# EAGLE board panel (EAGLE 6.3)
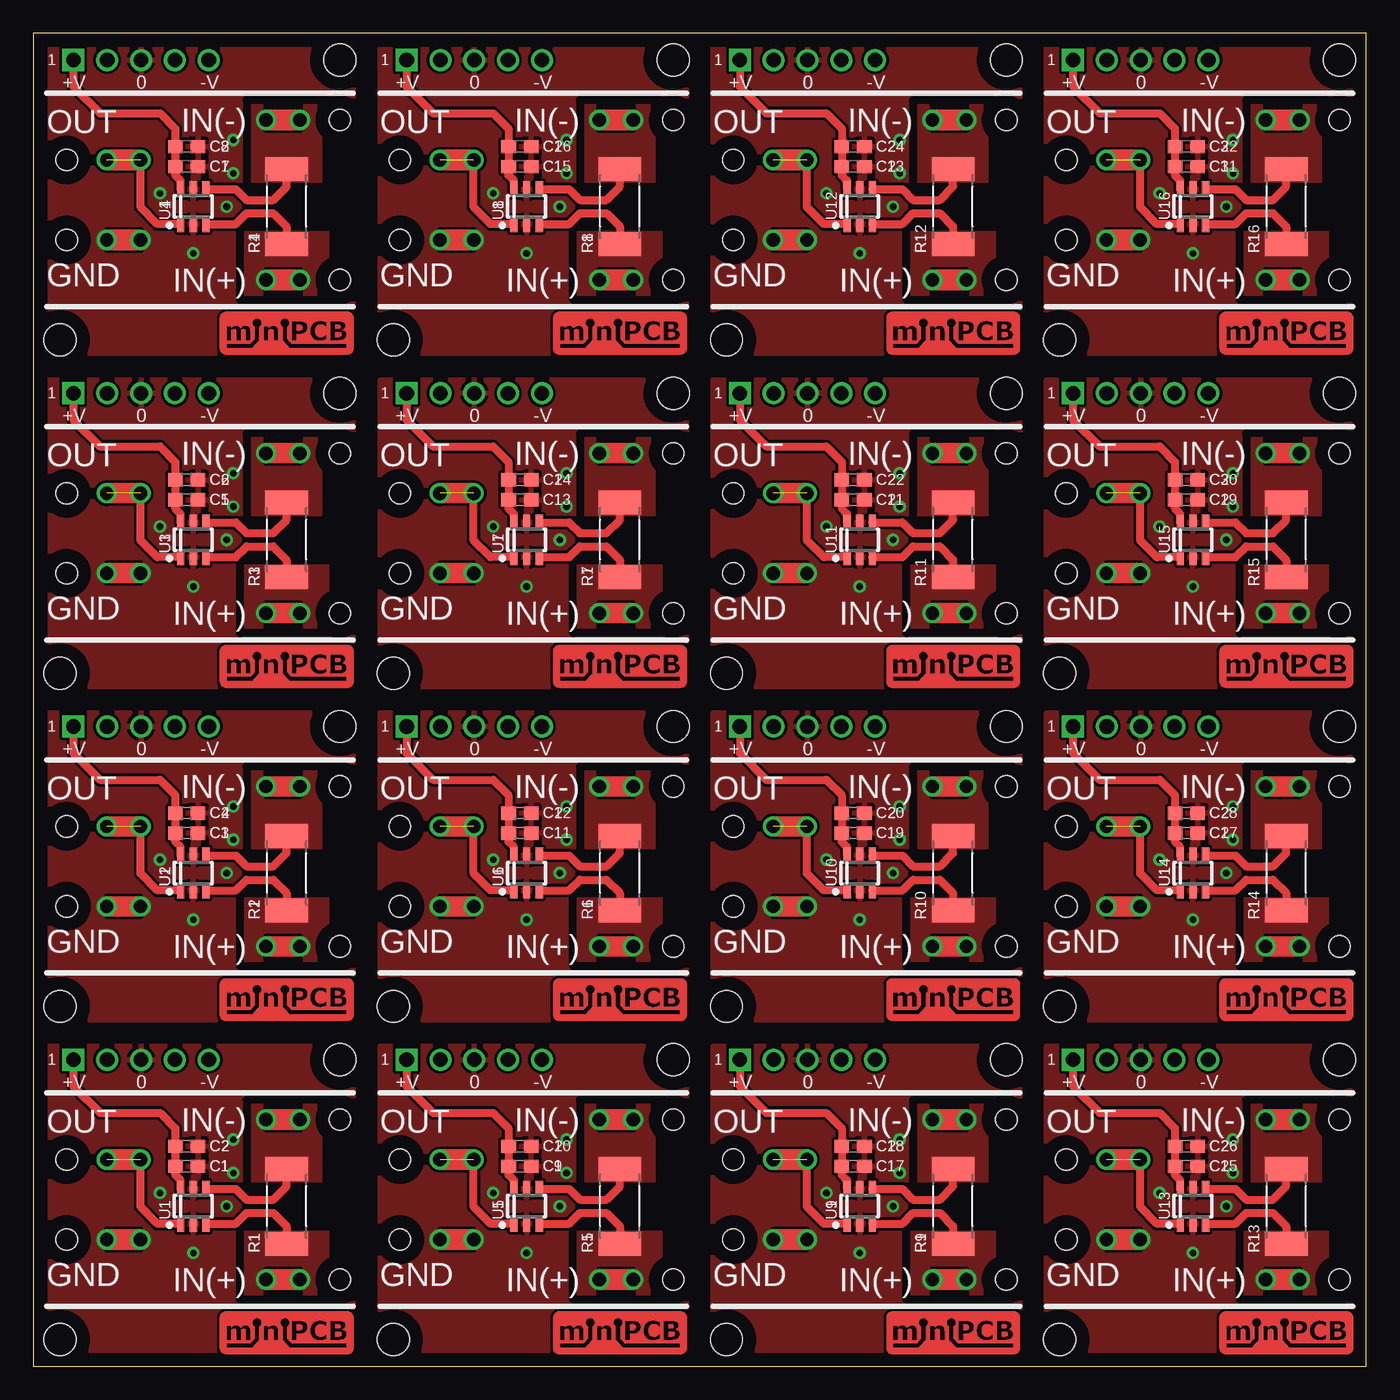
[diagram p0: board, top side]
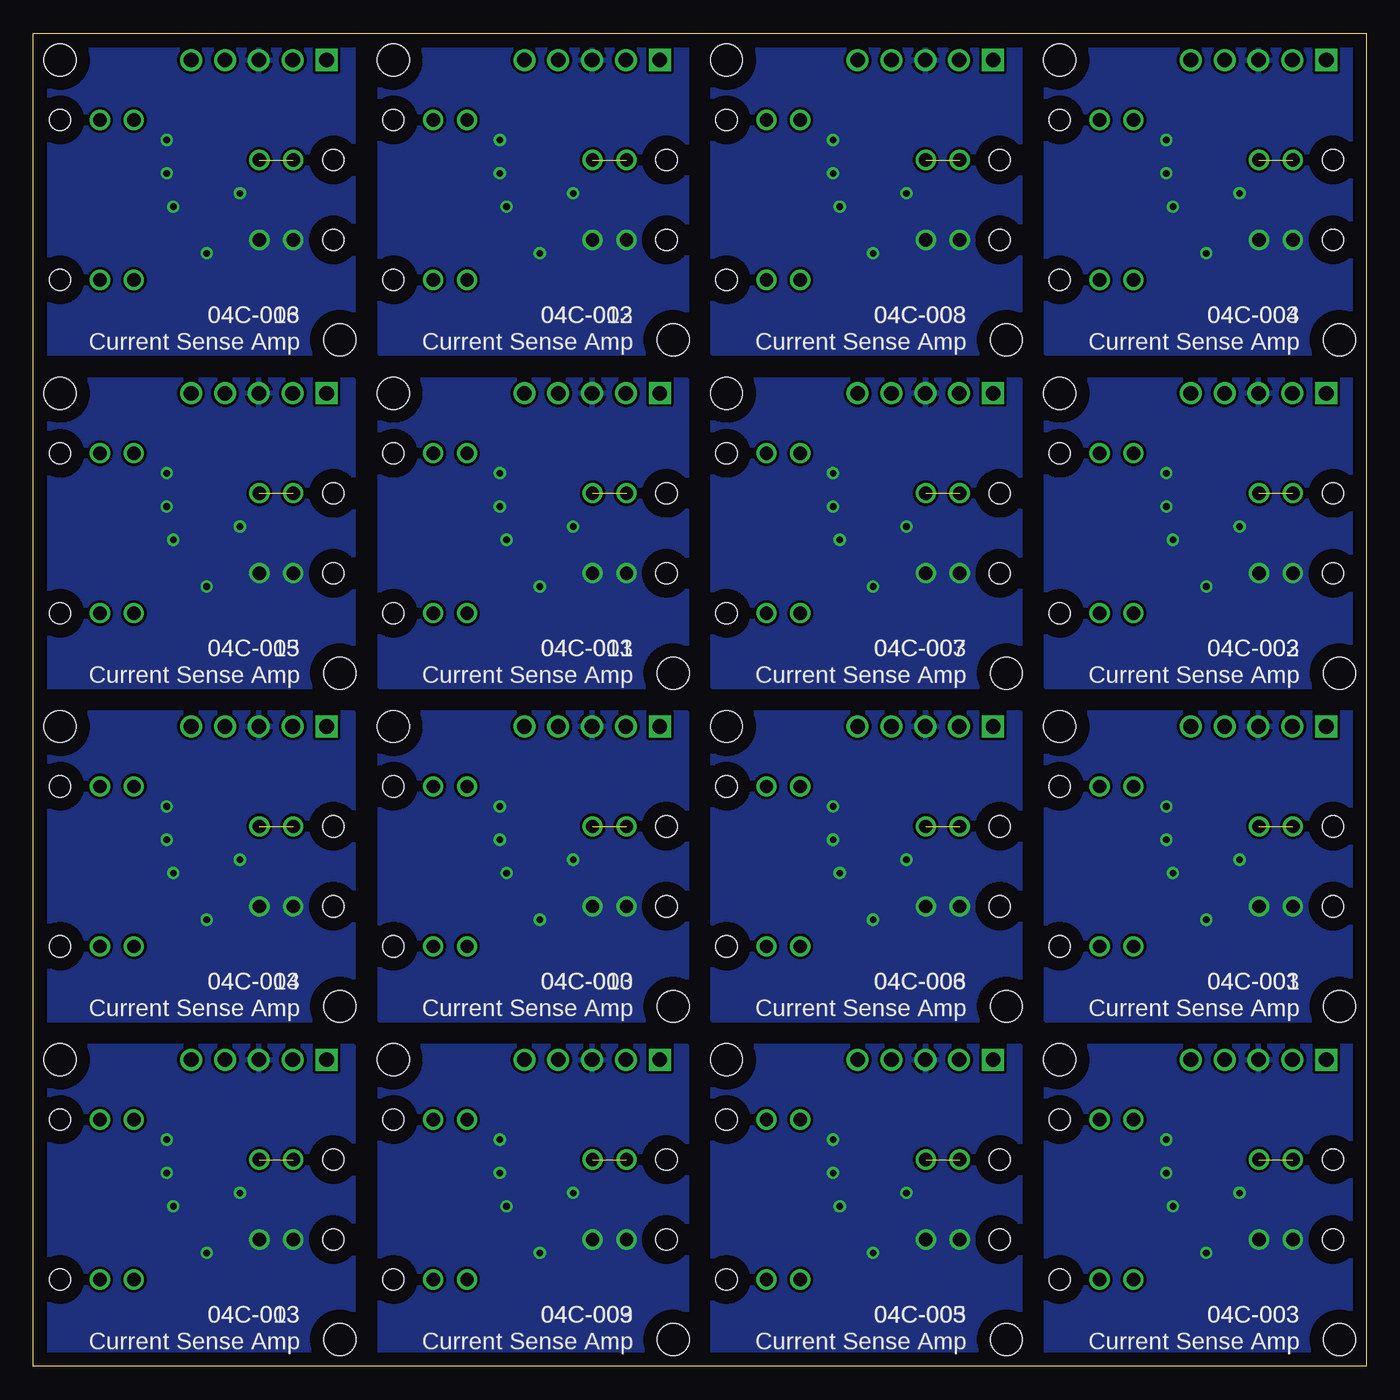
[diagram p1: board, bottom side, seen from below]

Size 100 x 100 mm. Coordinates in mm from the lower left corner, seen from the top.
Outline: 0,0 100,0 100,100 0,100 0,0
Copper layers (1*16): Top 0.035mm / dielectric 1.5mm / Bottom 0.035mm
Design rules "default *": minimum track width 10mil, minimum drill 24mil, track to track 8mil, track to pad 8mil, pad to pad 8mil, via to via 8mil, smd to smd 8mil, copper to edge 40mil, drill to drill 8mil, minimum pad ring 10mil, minimum via ring 8mil, stop-mask expansion 4mil, vias tented up to drill 20mil, thermal gap 10mil
Holes 1.6 mm at 2.5,15.5 2.5,9.5 23,18.5 23,6.5 2.5,40.5 2.5,34.5 23,43.5 23,31.5 2.5,65.5 2.5,59.5 23,68.5 23,56.5 2.5,90.5 2.5,84.5 23,93.5 23,81.5 27.5,15.5 27.5,9.5 48,18.5 48,6.5 27.5,40.5 27.5,34.5 48,43.5 48,31.5 27.5,65.5 27.5,59.5 48,68.5 48,56.5 27.5,90.5 27.5,84.5 48,93.5 48,81.5 52.5,15.5 52.5,9.5 73,18.5 73,6.5 52.5,40.5 52.5,34.5 73,43.5 73,31.5 52.5,65.5 52.5,59.5 73,68.5 73,56.5 52.5,90.5 52.5,84.5 73,93.5 73,81.5 77.5,15.5 77.5,9.5 98,18.5 98,6.5 77.5,40.5 77.5,34.5 98,43.5 98,31.5 77.5,65.5 77.5,59.5 98,68.5 98,56.5 77.5,90.5 77.5,84.5 98,93.5 98,81.5
tRestrict: 128 lines

## Footprints (pad centres in the part's own frame; a part is rotated, then mirrored left to right if it is on the bottom)
MINIPCB_25X25MM = drill 1.1 square: 1 3,23 | drill 1.1: 2 5.54,23; 3 8.08,23; 4 10.62,23; 5 13.16,23 | hole 2.4: 23,23; 2,2
C0603 = smd 1.1 x 1: 1 -0.85,0; 2 0.85,0
PINS_1_1MM_K = drill 1: 1 0,0; 2 2.54,0
R2512K = smd 1.8 x 3.2: 1 -2.8,0; 2 2.8,0
SOT23-6 = smd 0.55 x 1.2: 1 -0.95,-1.3; 2 0,-1.3; 3 0.95,-1.3; 4 0.95,1.3; 5 0,1.3; 6 -0.95,1.3

## Placement (x,y rotation side)
04C-001  Current Sense Amp  [MINIPCB_25X25MM]  0,25 0 top
04C-002  Current Sense Amp  [MINIPCB_25X25MM]  0,50 0 top
04C-003  Current Sense Amp  [MINIPCB_25X25MM]  0,0 0 top
04C-004  Current Sense Amp  [MINIPCB_25X25MM]  0,75 0 top
04C-005  Current Sense Amp  [MINIPCB_25X25MM]  25,0 0 top
04C-006  Current Sense Amp  [MINIPCB_25X25MM]  25,25 0 top
04C-007  Current Sense Amp  [MINIPCB_25X25MM]  25,50 0 top
04C-008  Current Sense Amp  [MINIPCB_25X25MM]  25,75 0 top
04C-009  Current Sense Amp  [MINIPCB_25X25MM]  50,0 0 top
04C-010  Current Sense Amp  [MINIPCB_25X25MM]  50,25 0 top
04C-011  Current Sense Amp  [MINIPCB_25X25MM]  50,50 0 top
04C-012  Current Sense Amp  [MINIPCB_25X25MM]  50,75 0 top
04C-013  Current Sense Amp  [MINIPCB_25X25MM]  75,0 0 top
04C-014  Current Sense Amp  [MINIPCB_25X25MM]  75,25 0 top
04C-015  Current Sense Amp  [MINIPCB_25X25MM]  75,50 0 top
04C-016  Current Sense Amp  [MINIPCB_25X25MM]  75,75 0 top
C1  4n7  [C0603]  11.5,15 0 top
C2  4u7  [C0603]  11.5,16.5 0 top
C3  4n7  [C0603]  11.5,40 0 top
C4  4u7  [C0603]  11.5,41.5 0 top
C5  4n7  [C0603]  11.5,65 0 top
C6  4u7  [C0603]  11.5,66.5 0 top
C7  4n7  [C0603]  11.5,90 0 top
C8  4u7  [C0603]  11.5,91.5 0 top
C9  4n7  [C0603]  36.5,15 0 top
C10  4u7  [C0603]  36.5,16.5 0 top
C11  4n7  [C0603]  36.5,40 0 top
C12  4u7  [C0603]  36.5,41.5 0 top
C13  4n7  [C0603]  36.5,65 0 top
C14  4u7  [C0603]  36.5,66.5 0 top
C15  4n7  [C0603]  36.5,90 0 top
C16  4u7  [C0603]  36.5,91.5 0 top
C17  4n7  [C0603]  61.5,15 0 top
C18  4u7  [C0603]  61.5,16.5 0 top
C19  4n7  [C0603]  61.5,40 0 top
C20  4u7  [C0603]  61.5,41.5 0 top
C21  4n7  [C0603]  61.5,65 0 top
C22  4u7  [C0603]  61.5,66.5 0 top
C23  4n7  [C0603]  61.5,90 0 top
C24  4u7  [C0603]  61.5,91.5 0 top
C25  4n7  [C0603]  86.5,15 0 top
C26  4u7  [C0603]  86.5,16.5 0 top
C27  4n7  [C0603]  86.5,40 0 top
C28  4u7  [C0603]  86.5,41.5 0 top
C29  4n7  [C0603]  86.5,65 0 top
C30  4u7  [C0603]  86.5,66.5 0 top
C31  4n7  [C0603]  86.5,90 0 top
C32  4u7  [C0603]  86.5,91.5 0 top
P1  IN+  [PINS_1_1MM_K]  20,6.5 180 top
P2  IN-  [PINS_1_1MM_K]  20,18.5 180 top
P3  GND  [PINS_1_1MM_K]  5.5,9.5 0 top
P4  OUT  [PINS_1_1MM_K]  5.5,15.5 0 top
P5  IN+  [PINS_1_1MM_K]  20,31.5 180 top
P6  IN-  [PINS_1_1MM_K]  20,43.5 180 top
P7  GND  [PINS_1_1MM_K]  5.5,34.5 0 top
P8  OUT  [PINS_1_1MM_K]  5.5,40.5 0 top
P9  IN+  [PINS_1_1MM_K]  20,56.5 180 top
P10  IN-  [PINS_1_1MM_K]  20,68.5 180 top
P11  GND  [PINS_1_1MM_K]  5.5,59.5 0 top
P12  OUT  [PINS_1_1MM_K]  5.5,65.5 0 top
P13  IN+  [PINS_1_1MM_K]  20,81.5 180 top
P14  IN-  [PINS_1_1MM_K]  20,93.5 180 top
P15  GND  [PINS_1_1MM_K]  5.5,84.5 0 top
P16  OUT  [PINS_1_1MM_K]  5.5,90.5 0 top
P17  IN+  [PINS_1_1MM_K]  45,6.5 180 top
P18  IN-  [PINS_1_1MM_K]  45,18.5 180 top
P19  GND  [PINS_1_1MM_K]  30.5,9.5 0 top
P20  OUT  [PINS_1_1MM_K]  30.5,15.5 0 top
P21  IN+  [PINS_1_1MM_K]  45,31.5 180 top
P22  IN-  [PINS_1_1MM_K]  45,43.5 180 top
P23  GND  [PINS_1_1MM_K]  30.5,34.5 0 top
P24  OUT  [PINS_1_1MM_K]  30.5,40.5 0 top
P25  IN+  [PINS_1_1MM_K]  45,56.5 180 top
P26  IN-  [PINS_1_1MM_K]  45,68.5 180 top
P27  GND  [PINS_1_1MM_K]  30.5,59.5 0 top
P28  OUT  [PINS_1_1MM_K]  30.5,65.5 0 top
P29  IN+  [PINS_1_1MM_K]  45,81.5 180 top
P30  IN-  [PINS_1_1MM_K]  45,93.5 180 top
P31  GND  [PINS_1_1MM_K]  30.5,84.5 0 top
P32  OUT  [PINS_1_1MM_K]  30.5,90.5 0 top
P33  IN+  [PINS_1_1MM_K]  70,6.5 180 top
P34  IN-  [PINS_1_1MM_K]  70,18.5 180 top
P35  GND  [PINS_1_1MM_K]  55.5,9.5 0 top
P36  OUT  [PINS_1_1MM_K]  55.5,15.5 0 top
P37  IN+  [PINS_1_1MM_K]  70,31.5 180 top
P38  IN-  [PINS_1_1MM_K]  70,43.5 180 top
P39  GND  [PINS_1_1MM_K]  55.5,34.5 0 top
P40  OUT  [PINS_1_1MM_K]  55.5,40.5 0 top
P41  IN+  [PINS_1_1MM_K]  70,56.5 180 top
P42  IN-  [PINS_1_1MM_K]  70,68.5 180 top
P43  GND  [PINS_1_1MM_K]  55.5,59.5 0 top
P44  OUT  [PINS_1_1MM_K]  55.5,65.5 0 top
P45  IN+  [PINS_1_1MM_K]  70,81.5 180 top
P46  IN-  [PINS_1_1MM_K]  70,93.5 180 top
P47  GND  [PINS_1_1MM_K]  55.5,84.5 0 top
P48  OUT  [PINS_1_1MM_K]  55.5,90.5 0 top
P49  IN+  [PINS_1_1MM_K]  95,6.5 180 top
P50  IN-  [PINS_1_1MM_K]  95,18.5 180 top
P51  GND  [PINS_1_1MM_K]  80.5,9.5 0 top
P52  OUT  [PINS_1_1MM_K]  80.5,15.5 0 top
P53  IN+  [PINS_1_1MM_K]  95,31.5 180 top
P54  IN-  [PINS_1_1MM_K]  95,43.5 180 top
P55  GND  [PINS_1_1MM_K]  80.5,34.5 0 top
P56  OUT  [PINS_1_1MM_K]  80.5,40.5 0 top
P57  IN+  [PINS_1_1MM_K]  95,56.5 180 top
P58  IN-  [PINS_1_1MM_K]  95,68.5 180 top
P59  GND  [PINS_1_1MM_K]  80.5,59.5 0 top
P60  OUT  [PINS_1_1MM_K]  80.5,65.5 0 top
P61  IN+  [PINS_1_1MM_K]  95,81.5 180 top
P62  IN-  [PINS_1_1MM_K]  95,93.5 180 top
P63  GND  [PINS_1_1MM_K]  80.5,84.5 0 top
P64  OUT  [PINS_1_1MM_K]  80.5,90.5 0 top
R1  [R2512K]  19,12 90 top
R2  [R2512K]  19,37 90 top
R3  [R2512K]  19,62 90 top
R4  [R2512K]  19,87 90 top
R5  [R2512K]  44,12 90 top
R6  [R2512K]  44,37 90 top
R7  [R2512K]  44,62 90 top
R8  [R2512K]  44,87 90 top
R9  [R2512K]  69,12 90 top
R10  [R2512K]  69,37 90 top
R11  [R2512K]  69,62 90 top
R12  [R2512K]  69,87 90 top
R13  [R2512K]  94,12 90 top
R14  [R2512K]  94,37 90 top
R15  [R2512K]  94,62 90 top
R16  [R2512K]  94,87 90 top
U1  INAX81  [SOT23-6]  12,12 0 top
U2  INAX81  [SOT23-6]  12,37 0 top
U3  INAX81  [SOT23-6]  12,62 0 top
U4  INAX81  [SOT23-6]  12,87 0 top
U5  INAX81  [SOT23-6]  37,12 0 top
U6  INAX81  [SOT23-6]  37,37 0 top
U7  INAX81  [SOT23-6]  37,62 0 top
U8  INAX81  [SOT23-6]  37,87 0 top
U9  INAX81  [SOT23-6]  62,12 0 top
U10  INAX81  [SOT23-6]  62,37 0 top
U11  INAX81  [SOT23-6]  62,62 0 top
U12  INAX81  [SOT23-6]  62,87 0 top
U13  INAX81  [SOT23-6]  87,12 0 top
U14  INAX81  [SOT23-6]  87,37 0 top
U15  INAX81  [SOT23-6]  87,62 0 top
U16  INAX81  [SOT23-6]  87,87 0 top

## Library data of the parts
04C-001-04C-009 04C-010-04C-016 C1-C32 U1-U16 = nolan-utsa
P1-P64 R1-R16 = nolan

## Nets
GND: 04C-003.3 C1.2 C2.2 P3.1 P3.2 U1.2 U1.5
GND1: 04C-001.3 C3.2 C4.2 P7.1 P7.2 U2.2 U2.5
GND2: 04C-002.3 C5.2 C6.2 P11.1 P11.2 U3.2 U3.5
GND3: 04C-004.3 C7.2 C8.2 P15.1 P15.2 U4.2 U4.5
GND4: 04C-005.3 C9.2 C10.2 P19.1 P19.2 U5.2 U5.5
GND5: 04C-006.3 C11.2 C12.2 P23.1 P23.2 U6.2 U6.5
GND6: 04C-007.3 C13.2 C14.2 P27.1 P27.2 U7.2 U7.5
GND7: 04C-008.3 C15.2 C16.2 P31.1 P31.2 U8.2 U8.5
GND8: 04C-009.3 C17.2 C18.2 P35.1 P35.2 U9.2 U9.5
GND9: 04C-010.3 C19.2 C20.2 P39.1 P39.2 U10.2 U10.5
GND10: 04C-011.3 C21.2 C22.2 P43.1 P43.2 U11.2 U11.5
GND11: 04C-012.3 C23.2 C24.2 P47.1 P47.2 U12.2 U12.5
GND12: 04C-013.3 C25.2 C26.2 P51.1 P51.2 U13.2 U13.5
GND13: 04C-014.3 C27.2 C28.2 P55.1 P55.2 U14.2 U14.5
GND14: 04C-015.3 C29.2 C30.2 P59.1 P59.2 U15.2 U15.5
GND15: 04C-016.3 C31.2 C32.2 P63.1 P63.2 U16.2 U16.5
IN+: P1.1 P1.2 R1.1 U1.3
IN+1: P5.1 P5.2 R2.1 U2.3
IN+2: P9.1 P9.2 R3.1 U3.3
IN+3: P13.1 P13.2 R4.1 U4.3
IN+4: P17.1 P17.2 R5.1 U5.3
IN+5: P21.1 P21.2 R6.1 U6.3
IN+6: P25.1 P25.2 R7.1 U7.3
IN+7: P29.1 P29.2 R8.1 U8.3
IN+8: P33.1 P33.2 R9.1 U9.3
IN+9: P37.1 P37.2 R10.1 U10.3
IN+10: P41.1 P41.2 R11.1 U11.3
IN+11: P45.1 P45.2 R12.1 U12.3
IN+12: P49.1 P49.2 R13.1 U13.3
IN+13: P53.1 P53.2 R14.1 U14.3
IN+14: P57.1 P57.2 R15.1 U15.3
IN+15: P61.1 P61.2 R16.1 U16.3
IN-: P2.1 P2.2 R1.2 U1.4
IN-1: P6.1 P6.2 R2.2 U2.4
IN-2: P10.1 P10.2 R3.2 U3.4
IN-3: P14.1 P14.2 R4.2 U4.4
IN-4: P18.1 P18.2 R5.2 U5.4
IN-5: P22.1 P22.2 R6.2 U6.4
IN-6: P26.1 P26.2 R7.2 U7.4
IN-7: P30.1 P30.2 R8.2 U8.4
IN-8: P34.1 P34.2 R9.2 U9.4
IN-9: P38.1 P38.2 R10.2 U10.4
IN-10: P42.1 P42.2 R11.2 U11.4
IN-11: P46.1 P46.2 R12.2 U12.4
IN-12: P50.1 P50.2 R13.2 U13.4
IN-13: P54.1 P54.2 R14.2 U14.4
IN-14: P58.1 P58.2 R15.2 U15.4
IN-15: P62.1 P62.2 R16.2 U16.4
N$1: P8.1 P8.2 U2.1
N$2: 04C-001.1 C3.1 C4.1 U2.6
N$3: P4.1 P4.2 U1.1
N$4: 04C-003.1 C1.1 C2.1 U1.6
N$5: P12.1 P12.2 U3.1
N$6: 04C-002.1 C5.1 C6.1 U3.6
N$7: P16.1 P16.2 U4.1
N$8: 04C-004.1 C7.1 C8.1 U4.6
N$9: P20.1 P20.2 U5.1
N$10: 04C-005.1 C9.1 C10.1 U5.6
N$11: P24.1 P24.2 U6.1
N$12: 04C-006.1 C11.1 C12.1 U6.6
N$13: P28.1 P28.2 U7.1
N$14: 04C-007.1 C13.1 C14.1 U7.6
N$15: P32.1 P32.2 U8.1
N$16: 04C-008.1 C15.1 C16.1 U8.6
N$17: P36.1 P36.2 U9.1
N$18: 04C-009.1 C17.1 C18.1 U9.6
N$19: P40.1 P40.2 U10.1
N$20: 04C-010.1 C19.1 C20.1 U10.6
N$21: P44.1 P44.2 U11.1
N$22: 04C-011.1 C21.1 C22.1 U11.6
N$23: P48.1 P48.2 U12.1
N$24: 04C-012.1 C23.1 C24.1 U12.6
N$25: P52.1 P52.2 U13.1
N$26: 04C-013.1 C25.1 C26.1 U13.6
N$27: P56.1 P56.2 U14.1
N$28: 04C-014.1 C27.1 C28.1 U14.6
N$29: P60.1 P60.2 U15.1
N$30: 04C-015.1 C29.1 C30.1 U15.6
N$31: P64.1 P64.2 U16.1
N$32: 04C-016.1 C31.1 C32.1 U16.6

## Tracks (layer width: path | path; a pad name or v marks a point on that pad's centre or on a via)
GND  (via drill 0.5)
  other vias: 9.5,13 15,17 15,14.5 14.5,12 12,8.5
  pour Top: 1,24 24,24 24,1 1,1
  pour Bottom: 1,24 24,24 24,1 1,1
GND1  (via drill 0.5)
  other vias: 9.5,38 15,42 15,39.5 14.5,37 12,33.5
  pour Top: 1,49 24,49 24,26 1,26
  pour Bottom: 1,49 24,49 24,26 1,26
GND2  (via drill 0.5)
  other vias: 9.5,63 15,67 15,64.5 14.5,62 12,58.5
  pour Top: 1,74 24,74 24,51 1,51
  pour Bottom: 1,74 24,74 24,51 1,51
GND3  (via drill 0.5)
  other vias: 9.5,88 15,92 15,89.5 14.5,87 12,83.5
  pour Top: 1,99 24,99 24,76 1,76
  pour Bottom: 1,99 24,99 24,76 1,76
GND4  (via drill 0.5)
  other vias: 34.5,13 40,17 40,14.5 39.5,12 37,8.5
  pour Top: 26,24 49,24 49,1 26,1
  pour Bottom: 26,24 49,24 49,1 26,1
GND5  (via drill 0.5)
  other vias: 34.5,38 40,42 40,39.5 39.5,37 37,33.5
  pour Top: 26,49 49,49 49,26 26,26
  pour Bottom: 26,49 49,49 49,26 26,26
GND6  (via drill 0.5)
  other vias: 34.5,63 40,67 40,64.5 39.5,62 37,58.5
  pour Top: 26,74 49,74 49,51 26,51
  pour Bottom: 26,74 49,74 49,51 26,51
GND7  (via drill 0.5)
  other vias: 34.5,88 40,92 40,89.5 39.5,87 37,83.5
  pour Top: 26,99 49,99 49,76 26,76
  pour Bottom: 26,99 49,99 49,76 26,76
GND8  (via drill 0.5)
  other vias: 59.5,13 65,17 65,14.5 64.5,12 62,8.5
  pour Top: 51,24 74,24 74,1 51,1
  pour Bottom: 51,24 74,24 74,1 51,1
GND9  (via drill 0.5)
  other vias: 59.5,38 65,42 65,39.5 64.5,37 62,33.5
  pour Top: 51,49 74,49 74,26 51,26
  pour Bottom: 51,49 74,49 74,26 51,26
GND10  (via drill 0.5)
  other vias: 59.5,63 65,67 65,64.5 64.5,62 62,58.5
  pour Top: 51,74 74,74 74,51 51,51
  pour Bottom: 51,74 74,74 74,51 51,51
GND11  (via drill 0.5)
  other vias: 59.5,88 65,92 65,89.5 64.5,87 62,83.5
  pour Top: 51,99 74,99 74,76 51,76
  pour Bottom: 51,99 74,99 74,76 51,76
GND12  (via drill 0.5)
  other vias: 84.5,13 90,17 90,14.5 89.5,12 87,8.5
  pour Top: 76,24 99,24 99,1 76,1
  pour Bottom: 76,24 99,24 99,1 76,1
GND13  (via drill 0.5)
  other vias: 84.5,38 90,42 90,39.5 89.5,37 87,33.5
  pour Top: 76,49 99,49 99,26 76,26
  pour Bottom: 76,49 99,49 99,26 76,26
GND14  (via drill 0.5)
  other vias: 84.5,63 90,67 90,64.5 89.5,62 87,58.5
  pour Top: 76,74 99,74 99,51 76,51
  pour Bottom: 76,74 99,74 99,51 76,51
GND15  (via drill 0.5)
  other vias: 84.5,88 90,92 90,89.5 89.5,87 87,83.5
  pour Top: 76,99 99,99 99,76 76,76
  pour Bottom: 76,99 99,99 99,76 76,76
IN+
  Top 0.61: R1.1 19,10.5 18,11.5 16,11.5 15.2,10.7 U1.3
  pour Top: 15.5,10.5 22.5,10.5 22.5,5 15.5,5
IN+1
  Top 0.61: R2.1 19,35.5 18,36.5 16,36.5 15.2,35.7 U2.3
  pour Top: 15.5,35.5 22.5,35.5 22.5,30 15.5,30
IN+2
  Top 0.61: R3.1 19,60.5 18,61.5 16,61.5 15.2,60.7 U3.3
  pour Top: 15.5,60.5 22.5,60.5 22.5,55 15.5,55
IN+3
  Top 0.61: R4.1 19,85.5 18,86.5 16,86.5 15.2,85.7 U4.3
  pour Top: 15.5,85.5 22.5,85.5 22.5,80 15.5,80
IN+4
  Top 0.61: R5.1 44,10.5 43,11.5 41,11.5 40.2,10.7 U5.3
  pour Top: 40.5,10.5 47.5,10.5 47.5,5 40.5,5
IN+5
  Top 0.61: R6.1 44,35.5 43,36.5 41,36.5 40.2,35.7 U6.3
  pour Top: 40.5,35.5 47.5,35.5 47.5,30 40.5,30
IN+6
  Top 0.61: R7.1 44,60.5 43,61.5 41,61.5 40.2,60.7 U7.3
  pour Top: 40.5,60.5 47.5,60.5 47.5,55 40.5,55
IN+7
  Top 0.61: R8.1 44,85.5 43,86.5 41,86.5 40.2,85.7 U8.3
  pour Top: 40.5,85.5 47.5,85.5 47.5,80 40.5,80
IN+8
  Top 0.61: R9.1 69,10.5 68,11.5 66,11.5 65.2,10.7 U9.3
  pour Top: 65.5,10.5 72.5,10.5 72.5,5 65.5,5
IN+9
  Top 0.61: R10.1 69,35.5 68,36.5 66,36.5 65.2,35.7 U10.3
  pour Top: 65.5,35.5 72.5,35.5 72.5,30 65.5,30
IN+10
  Top 0.61: R11.1 69,60.5 68,61.5 66,61.5 65.2,60.7 U11.3
  pour Top: 65.5,60.5 72.5,60.5 72.5,55 65.5,55
IN+11
  Top 0.61: R12.1 69,85.5 68,86.5 66,86.5 65.2,85.7 U12.3
  pour Top: 65.5,85.5 72.5,85.5 72.5,80 65.5,80
IN+12
  Top 0.61: R13.1 94,10.5 93,11.5 91,11.5 90.2,10.7 U13.3
  pour Top: 90.5,10.5 97.5,10.5 97.5,5 90.5,5
IN+13
  Top 0.61: R14.1 94,35.5 93,36.5 91,36.5 90.2,35.7 U14.3
  pour Top: 90.5,35.5 97.5,35.5 97.5,30 90.5,30
IN+14
  Top 0.61: R15.1 94,60.5 93,61.5 91,61.5 90.2,60.7 U15.3
  pour Top: 90.5,60.5 97.5,60.5 97.5,55 90.5,55
IN+15
  Top 0.61: R16.1 94,85.5 93,86.5 91,86.5 90.2,85.7 U16.3
  pour Top: 90.5,85.5 97.5,85.5 97.5,80 90.5,80
IN-
  Top 0.61: R1.2 19,13.5 18,12.5 16,12.5 15.2,13.3 U1.4
  pour Top: 16,20 22,20 22,13.5 16,13.5
IN-1
  Top 0.61: R2.2 19,38.5 18,37.5 16,37.5 15.2,38.3 U2.4
  pour Top: 16,45 22,45 22,38.5 16,38.5
IN-2
  Top 0.61: R3.2 19,63.5 18,62.5 16,62.5 15.2,63.3 U3.4
  pour Top: 16,70 22,70 22,63.5 16,63.5
IN-3
  Top 0.61: R4.2 19,88.5 18,87.5 16,87.5 15.2,88.3 U4.4
  pour Top: 16,95 22,95 22,88.5 16,88.5
IN-4
  Top 0.61: R5.2 44,13.5 43,12.5 41,12.5 40.2,13.3 U5.4
  pour Top: 41,20 47,20 47,13.5 41,13.5
IN-5
  Top 0.61: R6.2 44,38.5 43,37.5 41,37.5 40.2,38.3 U6.4
  pour Top: 41,45 47,45 47,38.5 41,38.5
IN-6
  Top 0.61: R7.2 44,63.5 43,62.5 41,62.5 40.2,63.3 U7.4
  pour Top: 41,70 47,70 47,63.5 41,63.5
IN-7
  Top 0.61: R8.2 44,88.5 43,87.5 41,87.5 40.2,88.3 U8.4
  pour Top: 41,95 47,95 47,88.5 41,88.5
IN-8
  Top 0.61: R9.2 69,13.5 68,12.5 66,12.5 65.2,13.3 U9.4
  pour Top: 66,20 72,20 72,13.5 66,13.5
IN-9
  Top 0.61: R10.2 69,38.5 68,37.5 66,37.5 65.2,38.3 U10.4
  pour Top: 66,45 72,45 72,38.5 66,38.5
IN-10
  Top 0.61: R11.2 69,63.5 68,62.5 66,62.5 65.2,63.3 U11.4
  pour Top: 66,70 72,70 72,63.5 66,63.5
IN-11
  Top 0.61: R12.2 69,88.5 68,87.5 66,87.5 65.2,88.3 U12.4
  pour Top: 66,95 72,95 72,88.5 66,88.5
IN-12
  Top 0.61: R13.2 94,13.5 93,12.5 91,12.5 90.2,13.3 U13.4
  pour Top: 91,20 97,20 97,13.5 91,13.5
IN-13
  Top 0.61: R14.2 94,38.5 93,37.5 91,37.5 90.2,38.3 U14.4
  pour Top: 91,45 97,45 97,38.5 91,38.5
IN-14
  Top 0.61: R15.2 94,63.5 93,62.5 91,62.5 90.2,63.3 U15.4
  pour Top: 91,70 97,70 97,63.5 91,63.5
IN-15
  Top 0.61: R16.2 94,88.5 93,87.5 91,87.5 90.2,88.3 U16.4
  pour Top: 91,95 97,95 97,88.5 91,88.5
N$1  (1 unrouted)
  Top 0.61: U2.1 9.3,35.7 8.04,36.96 P8.2
N$2
  Top 0.61: 04C-001.1 3,46 5,44 9.5,44 10.65,42.85 C4.1 C3.1 10.65,39.35 11.05,38.95 U2.6
N$3  (1 unrouted)
  Top 0.61: U1.1 9.3,10.7 8.04,11.96 P4.2
N$4
  Top 0.61: 04C-003.1 3,21 5,19 9.5,19 10.65,17.85 C2.1 C1.1 10.65,14.35 11.05,13.95 U1.6
N$5  (1 unrouted)
  Top 0.61: U3.1 9.3,60.7 8.04,61.96 P12.2
N$6
  Top 0.61: 04C-002.1 3,71 5,69 9.5,69 10.65,67.85 C6.1 C5.1 10.65,64.35 11.05,63.95 U3.6
N$7  (1 unrouted)
  Top 0.61: U4.1 9.3,85.7 8.04,86.96 P16.2
N$8
  Top 0.61: 04C-004.1 3,96 5,94 9.5,94 10.65,92.85 C8.1 C7.1 10.65,89.35 11.05,88.95 U4.6
N$9  (1 unrouted)
  Top 0.61: U5.1 34.3,10.7 33.04,11.96 P20.2
N$10
  Top 0.61: 04C-005.1 28,21 30,19 34.5,19 35.65,17.85 C10.1 C9.1 35.65,14.35 36.05,13.95 U5.6
N$11  (1 unrouted)
  Top 0.61: U6.1 34.3,35.7 33.04,36.96 P24.2
N$12
  Top 0.61: 04C-006.1 28,46 30,44 34.5,44 35.65,42.85 C12.1 C11.1 35.65,39.35 36.05,38.95 U6.6
N$13  (1 unrouted)
  Top 0.61: U7.1 34.3,60.7 33.04,61.96 P28.2
N$14
  Top 0.61: 04C-007.1 28,71 30,69 34.5,69 35.65,67.85 C14.1 C13.1 35.65,64.35 36.05,63.95 U7.6
N$15  (1 unrouted)
  Top 0.61: U8.1 34.3,85.7 33.04,86.96 P32.2
N$16
  Top 0.61: 04C-008.1 28,96 30,94 34.5,94 35.65,92.85 C16.1 C15.1 35.65,89.35 36.05,88.95 U8.6
N$17  (1 unrouted)
  Top 0.61: U9.1 59.3,10.7 58.04,11.96 P36.2
N$18
  Top 0.61: 04C-009.1 53,21 55,19 59.5,19 60.65,17.85 C18.1 C17.1 60.65,14.35 61.05,13.95 U9.6
N$19  (1 unrouted)
  Top 0.61: U10.1 59.3,35.7 58.04,36.96 P40.2
N$20
  Top 0.61: 04C-010.1 53,46 55,44 59.5,44 60.65,42.85 C20.1 C19.1 60.65,39.35 61.05,38.95 U10.6
N$21  (1 unrouted)
  Top 0.61: U11.1 59.3,60.7 58.04,61.96 P44.2
N$22
  Top 0.61: 04C-011.1 53,71 55,69 59.5,69 60.65,67.85 C22.1 C21.1 60.65,64.35 61.05,63.95 U11.6
N$23  (1 unrouted)
  Top 0.61: U12.1 59.3,85.7 58.04,86.96 P48.2
N$24
  Top 0.61: 04C-012.1 53,96 55,94 59.5,94 60.65,92.85 C24.1 C23.1 60.65,89.35 61.05,88.95 U12.6
N$25  (1 unrouted)
  Top 0.61: U13.1 84.3,10.7 83.04,11.96 P52.2
N$26
  Top 0.61: 04C-013.1 78,21 80,19 84.5,19 85.65,17.85 C26.1 C25.1 85.65,14.35 86.05,13.95 U13.6
N$27  (1 unrouted)
  Top 0.61: U14.1 84.3,35.7 83.04,36.96 P56.2
N$28
  Top 0.61: 04C-014.1 78,46 80,44 84.5,44 85.65,42.85 C28.1 C27.1 85.65,39.35 86.05,38.95 U14.6
N$29  (1 unrouted)
  Top 0.61: U15.1 84.3,60.7 83.04,61.96 P60.2
N$30
  Top 0.61: 04C-015.1 78,71 80,69 84.5,69 85.65,67.85 C30.1 C29.1 85.65,64.35 86.05,63.95 U15.6
N$31  (1 unrouted)
  Top 0.61: U16.1 84.3,85.7 83.04,86.96 P64.2
N$32
  Top 0.61: 04C-016.1 78,96 80,94 84.5,94 85.65,92.85 C32.1 C31.1 85.65,89.35 86.05,88.95 U16.6

## Text on the board
tPlace: IN(-) | IN(-) | IN(-) | IN(-) | OUT | OUT | OUT | OUT | IN(+) | IN(+) | IN(+) | IN(+) | GND | GND | GND | GND | OUT | IN(-) | OUT | IN(-) | OUT | IN(-) | OUT | IN(-) | GND | IN(+) | GND | IN(+) | GND | IN(+) | GND | IN(+) | IN(-) | IN(-) | IN(-) | IN(-) | OUT | OUT | OUT | OUT | IN(+) | IN(+) | IN(+) | IN(+) | GND | GND | GND | GND | OUT | IN(-) | OUT | IN(-) | OUT | IN(-) | OUT | IN(-) | GND | IN(+) | GND | IN(+) | GND | IN(+) | GND | IN(+)
_tNames: C2 | C2 | C2 | C2 | C1 | C1 | C1 | C1 | U1 | U1 | U1 | U1 | R1 | R1 | R1 | R1 | C2 | C2 | C2 | C2 | C1 | C1 | C1 | C1 | U1 | U1 | U1 | U1 | R1 | R1 | R1 | R1 | C2 | C2 | C2 | C2 | C1 | C1 | C1 | C1 | U1 | U1 | U1 | U1 | R1 | R1 | R1 | R1 | C2 | C2 | C2 | C2 | C1 | C1 | C1 | C1 | U1 | U1 | U1 | U1 | R1 | R1 | R1 | R1
_bNames: 04C-003 | 04C-003 | 04C-003 | 04C-003 | 04C-003 | 04C-003 | 04C-003 | 04C-003 | 04C-003 | 04C-003 | 04C-003 | 04C-003 | 04C-003 | 04C-003 | 04C-003 | 04C-003